# EAGLE board modelo 1 (EAGLE 9.7.0)

Size 911.05 x 150.55 mm. Coordinates in mm from the lower left corner, seen from the top.
Outline: 0,0 911.05,0 911.05,150.55 0,150.55 0,0
Copper layers (1*16): Top 0.035mm / dielectric 1.5mm / Bottom 0.035mm
Design rules "default": minimum track width 6mil, minimum drill 0.35mm, track to track 6mil, track to pad 6mil, pad to pad 6mil, via to via 6mil, smd to smd 6mil, copper to edge 40mil, drill to drill 6mil, minimum pad ring 10mil, minimum via ring 8mil, stop-mask expansion 4mil, vias tented up to drill 0mil, thermal gap 10mil

## Footprints (pad centres in the part's own frame; a part is rotated, then mirrored left to right if it is on the bottom)
BATTERY-GENERIC = drill 1.118 pad 3.15 octagon: + 2.54,0; - -2.54,0
CAP-THRU-2.54MM = drill 1.016 pad 1.88: 1 -1.27,0; 2 1.27,0
ARDUINO-UNO-R3-SHIELD = drill 1.016 pad 1.88: 3.3V 24.13,-2.54; 5V 24.13,0; A0 24.13,12.7; A1 24.13,15.24; A2 24.13,17.78; A3 24.13,20.32; A4 24.13,22.86; A5 24.13,25.4; AREF -24.13,-13.97; D2 -24.13,20.32; D3 -24.13,17.78; D4 -24.13,15.24; D5 -24.13,12.7; D6 -24.13,10.16; D7 -24.13,7.62; D8 -24.13,3.81; D9 -24.13,1.27; D10 -24.13,-1.27; D11 -24.13,-3.81; D12 -24.13,-6.35; D13 -24.13,-8.89; GND@0 24.13,2.54; GND@1 24.13,5.08; GND@2 -24.13,-11.43; IOREF 24.13,-7.62; NC 24.13,-10.16; RES 24.13,-5.08; RX -24.13,25.4; SCL -24.13,-19.05; SDA -24.13,-16.51; TX -24.13,22.86; VIN 24.13,7.62
LCD-I2C = drill 1.016 long: 1 -19.05,-5.08; 2 -19.05,-7.62; 3 -19.05,-10.16; 4 -19.05,-12.7

## Placement (x,y rotation side)
BAT1  LEMON  [BATTERY-GENERIC]  8.26,90.52 0 top
BAT2  LEMON  [BATTERY-GENERIC]  552.27,90.1 0 top
BAT3  LEMON  [BATTERY-GENERIC]  630.49,89.76 0 top
BAT4  LEMON  [BATTERY-GENERIC]  707.55,90.14 0 top
BAT5  LEMON  [BATTERY-GENERIC]  241.54,90.27 0 top
BAT6  LEMON  [BATTERY-GENERIC]  163.39,90.49 0 top
BAT7  LEMON  [BATTERY-GENERIC]  85.06,90.62 0 top
BAT8  LEMON  [BATTERY-GENERIC]  318.08,90.13 0 top
BAT9  LEMON  [BATTERY-GENERIC]  394.18,90.14 0 top
BAT10  LEMON  [BATTERY-GENERIC]  475.3,90.09 0 top
BAT11  LEMON  [BATTERY-GENERIC]  707.93,8.63 0 top
BAT12  LEMON  [BATTERY-GENERIC]  630.87,8.26 0 top
BAT13  LEMON  [BATTERY-GENERIC]  552.65,8.59 0 top
BAT14  LEMON  [BATTERY-GENERIC]  475.68,8.58 0 top
BAT15  LEMON  [BATTERY-GENERIC]  394.56,8.63 0 top
BAT16  LEMON  [BATTERY-GENERIC]  318.46,8.63 0 top
BAT17  LEMON  [BATTERY-GENERIC]  241.92,8.76 0 top
BAT18  LEMON  [BATTERY-GENERIC]  163.77,8.98 0 top
BAT19  LEMON  [BATTERY-GENERIC]  85.44,9.11 0 top
BAT20  LEMON  [BATTERY-GENERIC]  8.64,9.01 0 top
C1  1000u  [CAP-THRU-2.54MM]  794.2,96.57 0 top
U1  ARDUINO-UNO-R3-SHIELD  [ARDUINO-UNO-R3-SHIELD]  787.6,120.7 270 top
U2  LCD-16X2-I2CSUNFOUNDER-IIC  [LCD-I2C]  855.42,95.54 0 top

## Library data of the parts
BAT1-BAT20 C1 U1 U2 = Tinkercad

## Nets
BAT1+: BAT1.+ BAT7.-
BAT1-: BAT1.- U2.1
BAT2+: BAT2.+ BAT3.-
BAT3+: BAT3.+ BAT4.-
BAT5+: BAT5.+ BAT8.-
BAT6+: BAT5.- BAT6.+
BAT7+: BAT6.- BAT7.+
BAT8+: BAT8.+ BAT9.-
BAT9+: BAT9.+ BAT10.-
BAT10+: BAT2.- BAT10.+
BAT11+: BAT4.+ BAT11.+ C1.2 U1.VIN
BAT12+: BAT11.- BAT12.+
BAT13+: BAT12.- BAT13.+
BAT14+: BAT13.- BAT14.+
BAT15+: BAT14.- BAT15.+
BAT16+: BAT15.- BAT16.+
BAT17+: BAT16.- BAT17.+
BAT18+: BAT17.- BAT18.+
BAT19+: BAT18.- BAT19.+
BAT20+: BAT19.- BAT20.+
U1_A4: U1.A4 U2.3
U1_A5: U1.A5 U2.4
U1_GND: C1.1 U1.GND@0 U1.GND@1 U1.GND@2

## Tracks (layer width: path | path; a pad name or v marks a point on that pad's centre or on a via)
BAT1+  (1 unrouted)
BAT1-  (1 unrouted)
BAT2+  (1 unrouted)
BAT3+  (1 unrouted)
BAT5+  (1 unrouted)
BAT6+  (1 unrouted)
BAT7+  (1 unrouted)
BAT8+  (1 unrouted)
BAT9+  (1 unrouted)
BAT10+  (1 unrouted)
BAT11+  (3 unrouted)
BAT12+  (1 unrouted)
BAT13+  (1 unrouted)
BAT14+  (1 unrouted)
BAT15+  (1 unrouted)
BAT16+  (1 unrouted)
BAT17+  (1 unrouted)
BAT18+  (1 unrouted)
BAT19+  (1 unrouted)
BAT20+  (1 unrouted)
U1_A4  (1 unrouted)
U1_A5  (1 unrouted)
U1_GND  (3 unrouted)